# Altium PCB Triangular_Brakelight.PcbDoc
Units mil, origin at the board's own origin, x right, y up, seen from the top; angles counter-clockwise.
Board outline 3565.02 x 2690.03 mil, 2 copper layers (Top Layer, Bottom Layer); 23 components, 4 nets, 46 pads, 0 vias.
Unrouted connection lines stored in the file: 8.
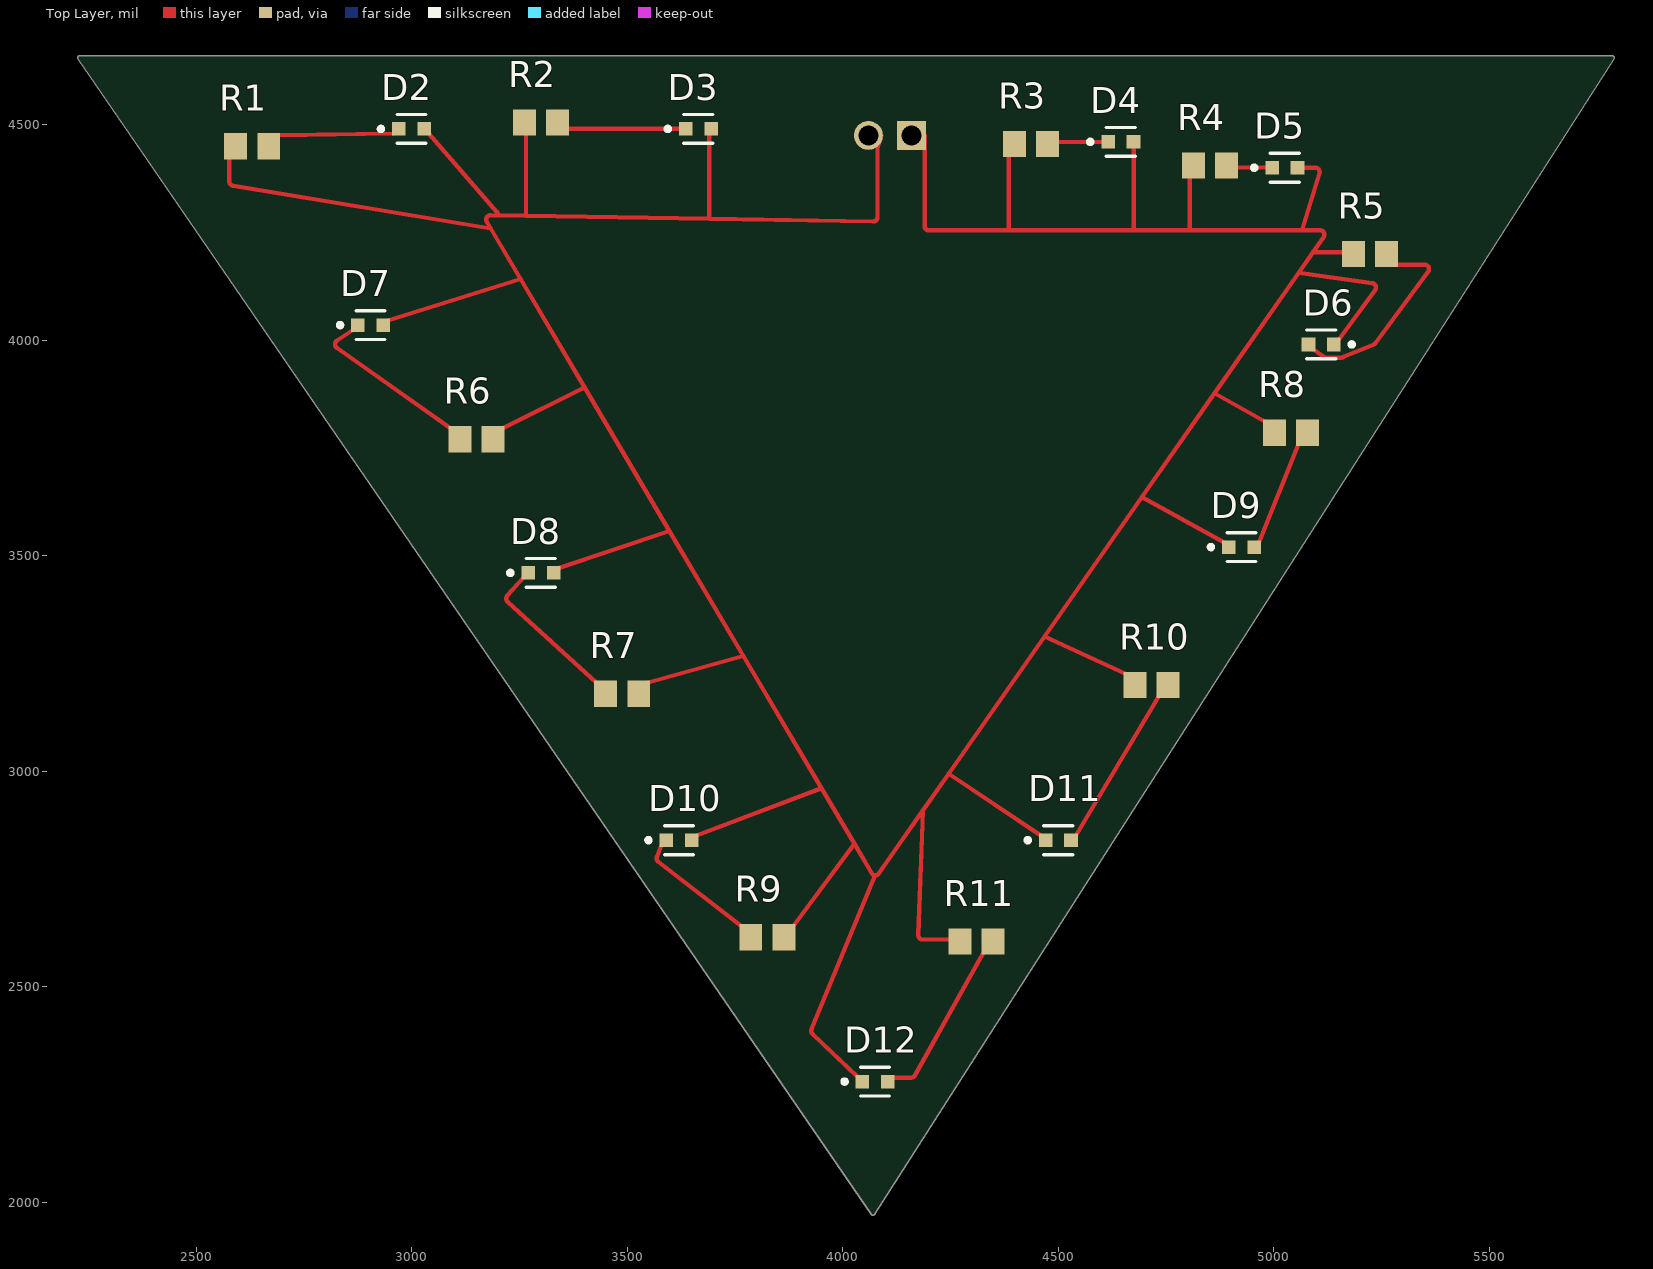
[diagram p0: Top Layer view]
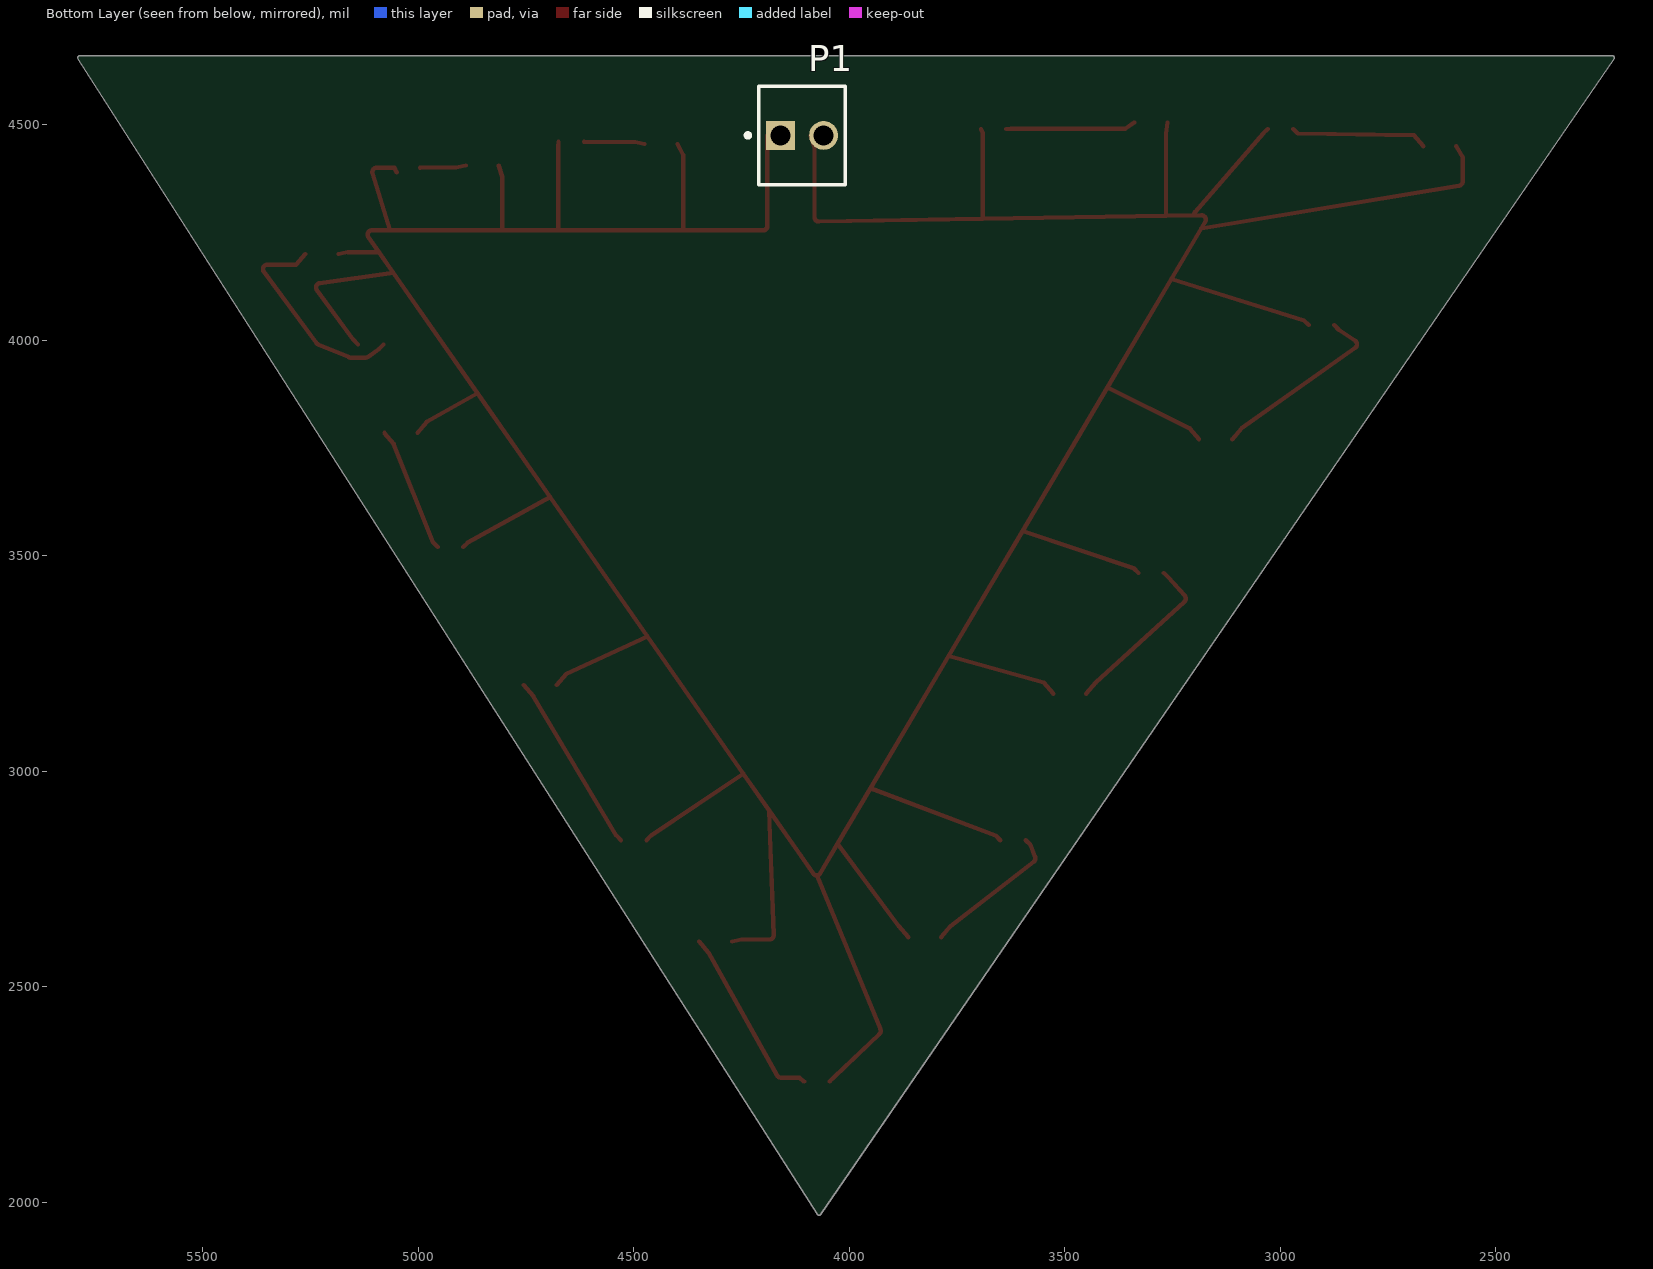
[diagram p1: Bottom Layer view, seen from below]
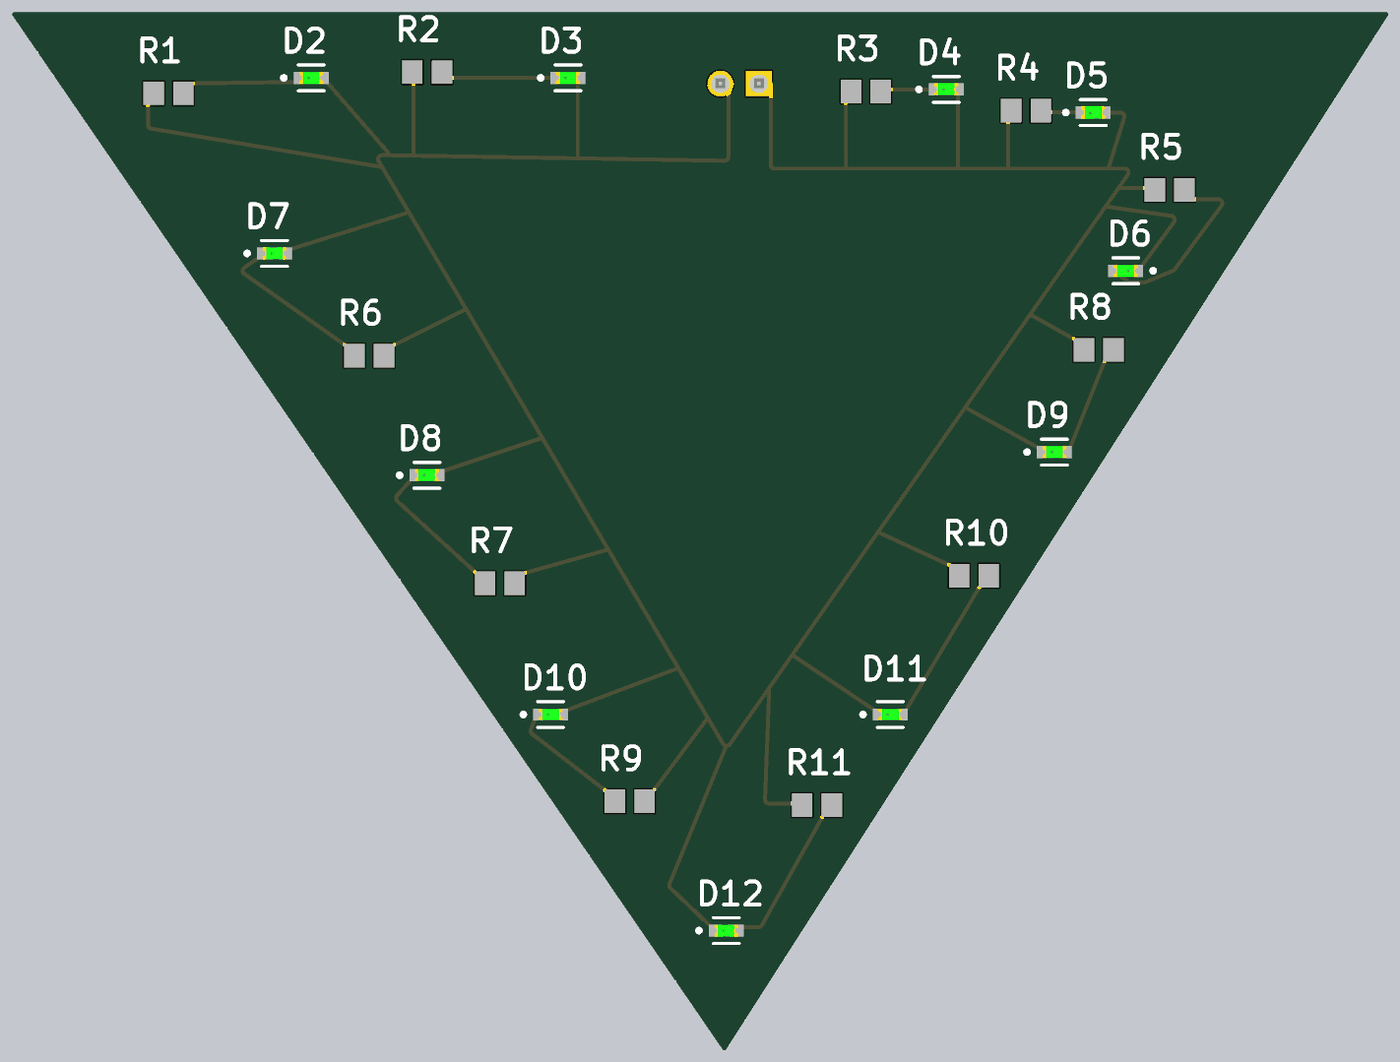
[diagram p2: 3D render of the assembled board from above, using the file's embedded part models]

## Layer stack, top to bottom
Top Solder: solder mask 0.4, Solder Resist, Dk 3.5
Top Layer: signal copper 1.4
Dielectric 1: dielectric 12.6, FR-4, Dk 4.8
Bottom Layer: signal copper 1.4
Bottom Solder: solder mask 0.4, Solder Resist, Dk 3.5

## Board outline
4065.87,1972.16 2225.87,4652.16 cw(c2230,4655) 2230,4660.02 5785,4660.02 cw(c5785,4655) 5790.02,4655 5789.21,4652.28 4074.24,1972.31 cw(c4070,1975)

## Design rules (kind name [scope] priority, off if disabled: settings)
Clearance [All] p1: gap=10 ignorepadtopadclearanceinfootprint=FALSE except(0: Arc-Hole Track-Hole SMDPad-Hole THPad-Hole Via-Hole Fill-Hole Poly-Hole Region-Hole Text-Hole)
PolygonConnect [All] p1: connectstyle=Relief reliefconductorwidth=10 reliefentries=4 polygonreliefangle="90 Angle" airgapwidth=10
RoutingVias [All] p1: holewidth=28 width=50 viastyle="Through Hole" minholewidth=28 minwidth=50 maxholewidth=28 maxwidth=50
SolderMaskExpansion [All] p1: expansion=4 istentingtop=FALSE
Width [All] p1: maxlimit=10 minlimit=10 preferedwidth=10
30 further rules are at their usual default settings.

## Components (designator, comment, footprint, x,y, rotation, side; value= is the part's Value field where it differs from the comment)
D2 "LTST-C190GKT" FP-LTST-C190GKT-MFG 2999.53,4490 r0 top
D3 "LTST-C190GKT" FP-LTST-C190GKT-MFG 3665,4490 r0 top
D4 "LTST-C190GKT" FP-LTST-C190GKT-MFG 4645,4460 r0 top
D5 "LTST-C190GKT" FP-LTST-C190GKT-MFG 5025.47,4400 r0 top
D6 "LTST-C190GKT" FP-LTST-C190GKT-MFG 5110,3990 r180 top
D7 "LTST-C190GKT" FP-LTST-C190GKT-MFG 2904.53,4035 r0 top
D8 "LTST-C190GKT" FP-LTST-C190GKT-MFG 3299.53,3460 r0 top
D9 "LTST-C190GKT" FP-LTST-C190GKT-MFG 4925,3520 r0 top
D10 "LTST-C190GKT" FP-LTST-C190GKT-MFG 3620,2840 r0 top
D11 "LTST-C190GKT" FP-LTST-C190GKT-MFG 4500,2840 r0 top
D12 "LTST-C190GKT" FP-LTST-C190GKT-MFG 4075,2280 r0 top
P1 "22-27-2021" MOLX-22-27-2021_V 4109.49,4475 r180 bottom
R1 "RL1220S-100-F" RESC2013X50X40ML20T20 2630,4450 r0 top
R2 "RL1220S-100-F" RESC2013X50X40ML20T20 3300,4505 r0 top
R3 "RL1220S-100-F" RESC2013X50X40ML20T20 4436.61,4455 r0 top
R4 "RL1220S-100-F" RESC2013X50X40ML20T20 4851.61,4405 r0 top
R5 "RL1220S-100-F" RESC2013X50X40ML20T20 5223.39,4200 r0 top
R6 "RL1220S-100-F" RESC2013X50X40ML20T20 3150,3770 r0 top
R7 "RL1220S-100-F" RESC2013X50X40ML20T20 3488.39,3180 r0 top
R8 "RL1220S-100-F" RESC2013X50X40ML20T20 5040,3785 r0 top
R9 "RL1220S-100-F" RESC2013X50X40ML20T20 3825,2615 r0 top
R10 "RL1220S-100-F" RESC2013X50X40ML20T20 4716.61,3200 r0 top
R11 "RL1220S-100-F" RESC2013X50X40ML20T20 4310,2605 r0 top

## Footprints (in the part's own frame and the unit in brackets; to place one, negate y for a bottom-side part, rotate by r counter-clockwise, add the part's x,y. Pads: shape width x height; smd on the part's side, far side on the other; paste and mask are expansions set on the pad)
FP-LTST-C190GKT-MFG [mm]
  rect 0.8x0.8 smd paste+0 mask+0: 1(-0.75,0) 2(0.75,0)
  silkscreen extent -1.92,-0.85 0.85,0.85, body extent -1.25,-0.55 1.25,0.55, height 0.25
MOLX-22-27-2021_V [mm] "Header, 2-Leads, Body 5.8x5.08mm"
  rect 1.7x1.7 hole 1.19: 1(-1.27,0)
  round 1.7 hole 1.19: 2(1.27,0)
  silkscreen extent -3.32,-2.9 2.54,2.9, body extent -2.54,-2.9 2.54,2.9, height 11.72
RESC2013X50X40ML20T20 [mm] "Chip Resistor, 2-Leads, Body 2.00x1.25mm, IPC Low Density"
  rect 1.35x1.55 smd: 1(-0.975,0) 2(0.975,0)
  body extent -1.1,-0.72 1.1,0.72, height 0.5

## Part data
D2 D3 D4 D5 D6 D7 D8 D9 D10 D11 D12: library part CMP-22017-000005-2, "LED GREEN CLEAR CHIP SMD", Case Code (Imperial)=0603, Case Code (Metric)=1608, Color=Green, Forward Current=30mA, Forward Voltage=2.1V, Lens Color=Colorless, Max Operating Temperature=85°C, Min Operating Temperature=-55°C, Package Quantity=1, Power Dissipation=100mW, Reverse Voltage=5V, Test Current=10mA, Voltage=2V, Case/Package=0603, Depth=0.8mm, Dominant Wavelength=569nm, Height=0.8mm, Illumination Color=Green, Lead Free="Lead Free", Length=1.6mm, Lens Style=Clear, Lens Transparency=Clear, Luminous Intensity=6mcd, Mount="Surface Mount", Number of Elements=1, Number of LEDs=1, Number of Pins=2, Packaging="Tape and Reel", Power Rating=100mW, Radiation Hardening=No, Viewing Angle=130°, Wavelength=565nm, Width=0.8mm
P1: library part CMP-2000-05537-1, "Male Header, Pitch 2.54 mm, 1 x 2 Position, Height 11.7 mm, Tail Length 3.56 mm, 0 to 75 degC, RoHS, Bulk", Current - Max=4A, Manufacturer=Molex, Operating temperature=0°Cto+75°C, Package Description="2-Leads Header, Body 5.08 x 5.8 mm, Pitch 2.54 mm", Package Version="Rev. BC, 02/2012", PartNumber=0022272021, Voltage - Max=250V, Contact material=Tinplatedbrass, Current rating=4A, Datasheet URL=http://www.molex.com/pdm_docs/sd/022272021_sd.pdf, Datasheet Version="Rev. F, 06/2009", Housing material=Nylon(UL94V-0), Manufacturer URL=http://www.molex.com/, Mounting Technology=ThroughHole, No. of Positions=2, No. of Rows=1, Orientation=Vertical, Package Reference=22-27-2021, Pitch=2.54mm, Voltage rating=250V
R1 R2 R3 R4 R5 R6 R7 R8 R9 R10 R11: library part CMP-2001-03134-1, Manufacturer=Susumu, Part Number=RL1220S-100-F

## Nets (pads, with @x,y where several pads share a name; then routed paths per layer and width w, separated by ;. In a path a pad name is that pad's centre, name@x,y a point inside that pad or via, vN(x,y) a via of type N, cw(c..) or ccw(c..) an arc to the next point about the centre after c; other vN are vias at no path point)
GND: D2.1 D2.2 D3.1 D3.2 D4.1 D4.2 D5.1 D5.2 D6.1 D7.1 D7.2 D8.1 D8.2 D9.1 D10.1 D10.2 D11.1 D12.1 D12.2 P1.1 P1.2 R1.1 R1.2 R2.1 R2.2 R3.1 R3.2 R4.1 R4.2 R5.1 R6.1 R6.2 R7.1 R7.2 R8.1 R9.1 R9.2 R10.1 R11.1 R11.2 | length 14525.9
  Top Layer w10: 2585,4358.34 cw(c2586.68,4368.2) 2576.68,4368.2 2576.68,4424.49 R1.1 ; 2585.04,4358.33 3183.32,4259 ; R1.2 2689.96,4475.51 2959.25,4479.25 D2.1 ; 2826.21,3982.07 3090.04,3795.51 R6.1 ; 2826.18,3982.1 cw(c2831.98,3990.24) 2826.36,3998.51 2864.25,4024.25 D7.1 ; D7.2 2944.8,4045.75 3252.7,4141.59 ; D2.2 3039.8,4479.25 3197.54,4297.83 ; 3174.07,4274.65 cw(c3182.7,4279.71) 3182.86,4289.71 3199.99,4289.43 ; 3174.09,4274.62 3183.32,4259 ; R6.2 3209.96,3795.51 3401.01,3890.6 ; 3197.57,4297.8 cw(c3189.99,4291.27) 3199.99,4291.25 3199.99,4289.43 ; 3222.41,3393.24 3428.43,3205.51 R7.1 ; 3222.38,3393.28 cw(c3229.15,3400.64) 3221.7,3407.31 3259.25,3449.25 D8.1 ; R2.1 3264.97,4479.49 3264.97,4288.36 ; D8.2 3339.8,3470.75 3598.2,3556.89 ; R2.2 3359.96,4490.54 3624.72,4490.54 D3.1 ; R7.2 3548.35,3205.51 3769.21,3267.49 ; 3571.86,2789.7 3765.04,2640.51 R9.1 ; 3571.83,2789.73 cw(c3577.97,2797.62) 3568.67,2801.29 3579.72,2829.25 D10.1 ; D10.2 3660.28,2850.75 3950.67,2960.4 ; D3.2 3689.94,4479.25 3689.94,4281.39 ; R9.2 3884.96,2640.51 4027.02,2831.19 ; 3930.15,2390.11 cw(c3937.07,2397.33) 3927.98,2401.51 4074.88,2758.5 ; 3930.18,2390.08 4034.72,2290.75 D12.1 ; 4083.88,2762.71 cw(c4075.7,2768.47) 4074.88,2758.5 ; 4083.9,2762.74 4111.6,2802.38 4186.2,2909.16 ; P1.2@4090,4475 4080.5,4446.54 4080.5,4285.16 cw(c4070.49,4285.16) 4070.37,4275.16 3689.94,4281.39 ; D12.2 4115.28,2289.08 4158.62,2289.08 ccw(c4158.62,2299.08) 4167.35,2294.2 4326.81,2579.49 R11.2 ; P1.1@4190,4475 4190,4260.86 4195.86,4255 4385,4255 ; R11.1 4250.04,2609.48 4185.36,2609.48 cw(c4185.36,2619.48) 4175.37,2619.84 4186.2,2909.16 ; R3.1 4385,4429.49 4385,4255 ; D11.1 4459.72,2850.75 4245.79,2994.45 ; R3.2 4496.57,4459.62 4604.72,4459.62 D4.1 ; D4.2 4675,4449.25 4675,4255 ; R10.1 4656.65,3225.51 4468.19,3312.77 ; R4.1 4805,4379.49 4805,4255 ; R4.2 4911.57,4400.51 4985.2,4400.51 D5.1 ; D9.1 4884.72,3530.75 4693.88,3635.78 ; R8.1 4980.04,3810.51 4862.32,3876.87 ; D5.2@5050,4389.25 D5.2 5096.43,4400 cw(c5096.43,4390) 5105.98,4387.04 5065,4255 ; D6.1 5150.28,4000.75 5235.13,4116.53 ccw(c5227.06,4122.44) 5228.47,4132.35 5057.74,4156.58 ; R5.1 5163.43,4204.26 5091.06,4204.26 ; 3183.32,4259 3252.7,4141.59 ; 3199.99,4289.43 3264.97,4288.36 ; 3252.7,4141.59 3401.01,3890.6 ; 3264.97,4288.36 3689.94,4281.39 ; 3401.01,3890.6 3598.2,3556.89 ; 3598.2,3556.89 3769.21,3267.49 ; 3769.21,3267.49 3950.67,2960.4 ; 3950.67,2960.4 4027.02,2831.19 ; 4027.02,2831.19 4067.12,2763.34 ccw(c4075.7,2768.47) 4074.88,2758.5 ; 4186.2,2909.16 4245.79,2994.45 ; 4245.79,2994.45 4468.19,3312.77 ; 4385,4255 4675,4255 ; 4468.19,3312.77 4693.88,3635.78 ; 4675,4255 4805,4255 ; 4693.88,3635.78 4862.32,3876.87 ; 4805,4255 5065,4255 ; 4862.32,3876.87 5057.74,4156.58 ; 5057.74,4156.58 5091.06,4204.26 ; 5065,4255 5107.32,4255 cw(c5107.32,4245) 5115.52,4239.27 5091.06,4204.26
NetD6_2: D6.2 R5.2 | length 501.5
  Top Layer w10: D6.2 5091.22,3979.25 5115,3962.09 ccw(c5123.78,3974.25) 5123.78,3959.25 5155.28,3959.25 ccw(c5155.28,3974.25) 5161.08,3960.42 5232.65,3990.45 ccw(c5228.78,3999.67) 5236.84,3993.75 5358.3,4159.08 ccw(c5350.24,4165) 5350.24,4175 5283.35,4175 R5.2
NetD9_2: D9.2 R8.2 | length 295
  Top Layer w10: D9.2 4965.28,3530.75 5056.81,3759.49 R8.2
NetD11_2: D11.2 R10.2 | length 425.6
  Top Layer w10: D11.2 4540.28,2850.75 4733.43,3174.49 R10.2

## Silkscreen, mask and mechanical layers (free items; w line width, h text height)
Outline:
  lines w10: 1710,4895 6300,4895 4040,1450 1705,4885 1700,4895 1725,4895 ; 2230,4655 4070,1975 5785,4655 2230,4655